# Altium PCB PCB3.PcbDoc
Units mil, origin at the board's own origin, x right, y up, seen from the top; angles counter-clockwise.
Board outline 6000 x 4000 mil, 2 copper layers (Top Layer, Bottom Layer); 61 components, 65 nets, 269 pads, 0 vias.
Unrouted connection lines stored in the file: 151.
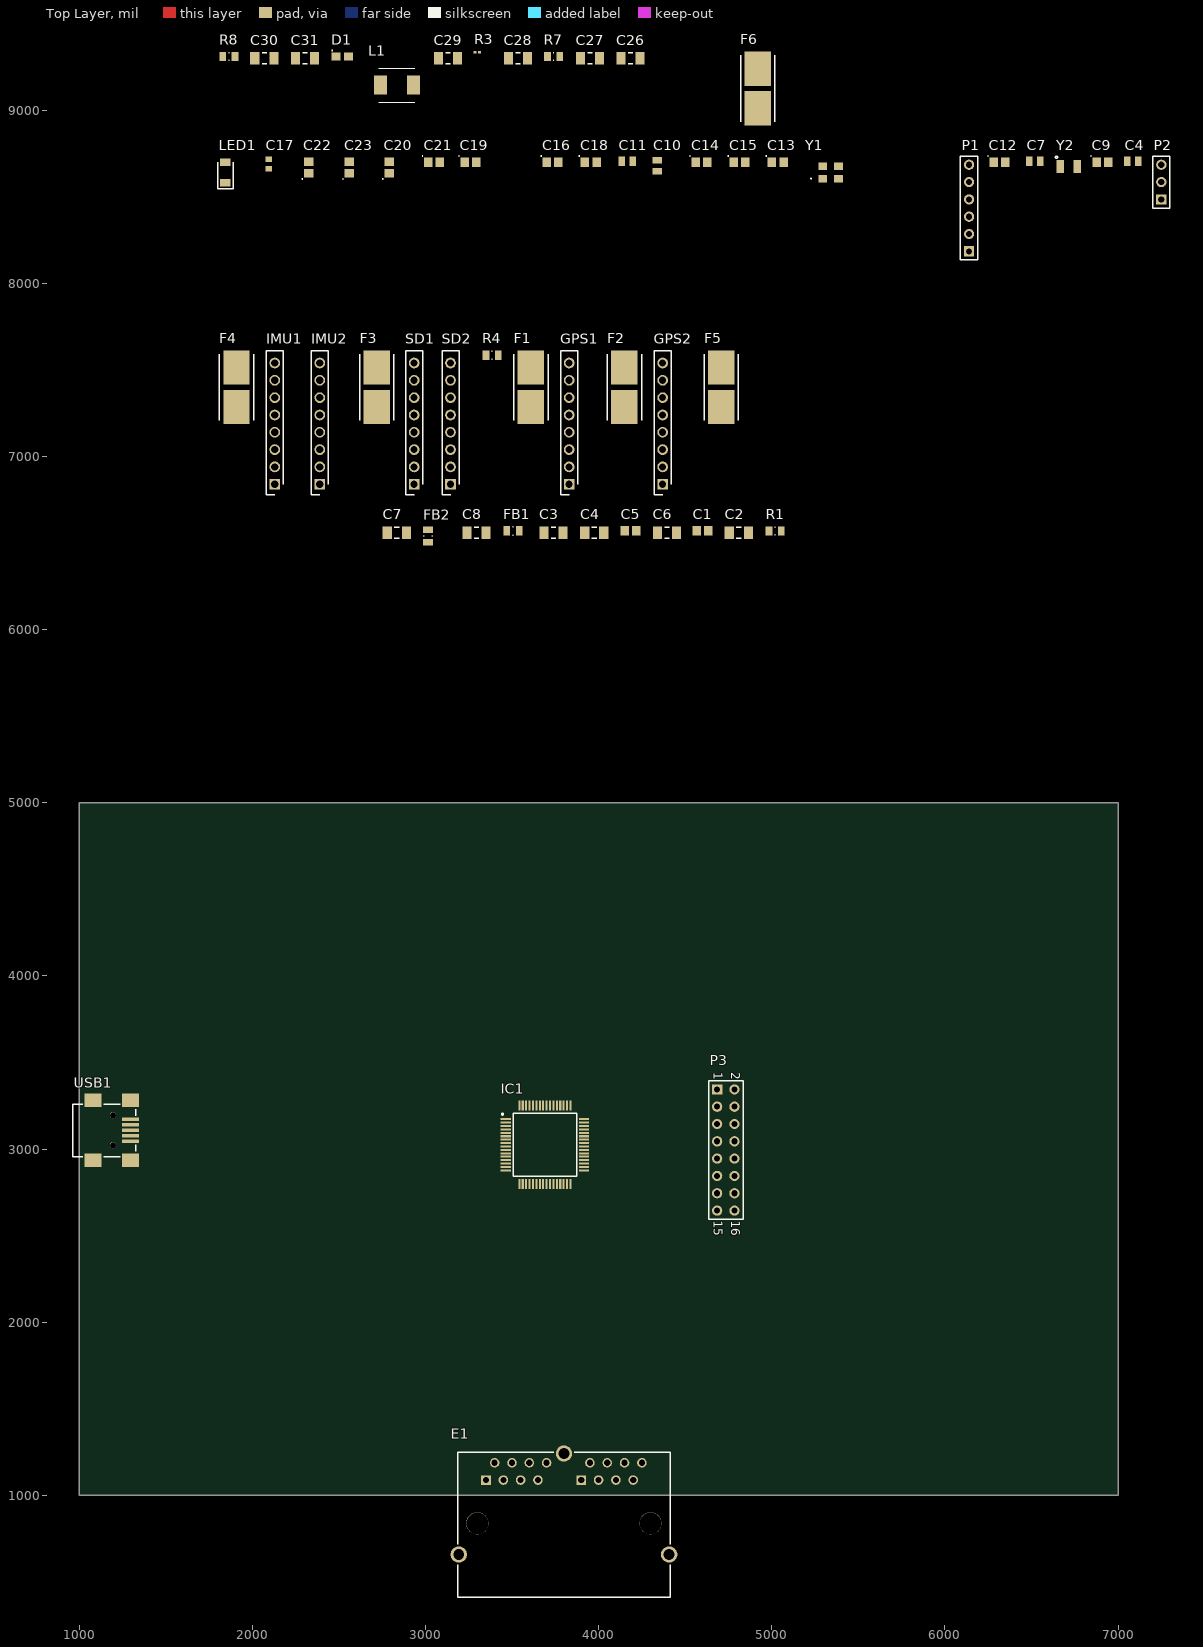
[diagram p0: Top Layer view]
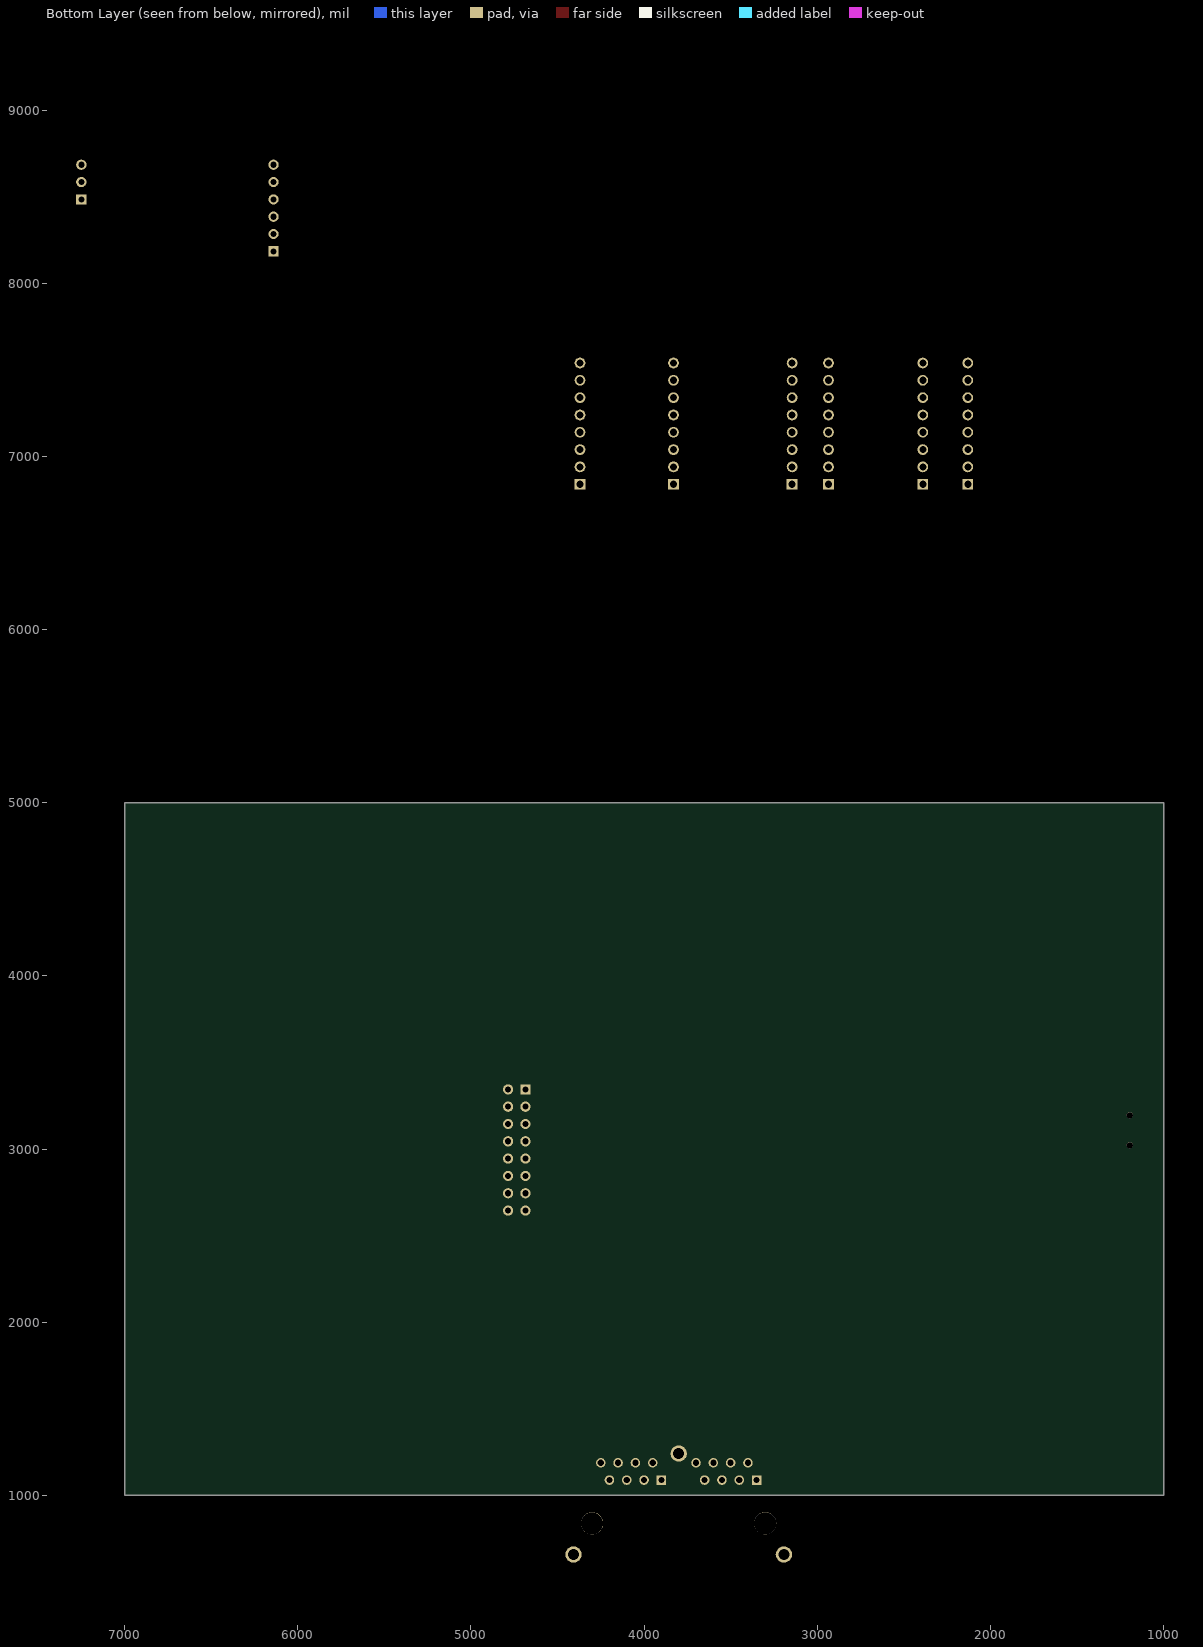
[diagram p1: Bottom Layer view, seen from below]

## Layer stack, top to bottom
Top Solder: solder mask 0.4, Solder Resist, Dk 3.5
Top Layer: signal copper 1.4
Dielectric 1: dielectric 12.6, FR-4, Dk 4.8
Bottom Layer: signal copper 1.4
Bottom Solder: solder mask 0.4, Solder Resist, Dk 3.5

## Board outline
1000,1000 7000,1000 7000,5000 1000,5000

## Design rules (kind name [scope] priority, off if disabled: settings)
Clearance [All] p1: gap=10 ignorepadtopadclearanceinfootprint=FALSE except(0: Arc-Hole Track-Hole SMDPad-Hole THPad-Hole Via-Hole Fill-Hole Poly-Hole Region-Hole Text-Hole)
DiffPairsRouting [All] p1: maxlimit=10 minlimit=10 mostfreqgap=10 toplayer_minwidth=15 toplayer_maxwidth=15 toplayer_prefwidth=15 bottomlayer_minwidth=15 bottomlayer_maxwidth=15 bottomlayer_prefwidth=15 maxuncoupledlength=500
PolygonConnect [All] p1: connectstyle=Relief reliefconductorwidth=10 reliefentries=4 polygonreliefangle="90 Angle" airgapwidth=10
RoomDefinition Supply [InComponentClass('Supply')] p1: confinementstyle=ConfineIn formatcopy=TRUE lockcomponents=FALSE outline 1790,8895 5035,8895 5035,9455 1790,9455
RoomDefinition MCU [InComponentClass('MCU')] p2: confinementstyle=ConfineIn formatcopy=TRUE lockcomponents=FALSE outline 1790,6505 7325,6505 7325,8845 1790,8845
RoomDefinition Componentes [InComponentClass('Componentes')] p3: confinementstyle=ConfineIn formatcopy=TRUE lockcomponents=FALSE outline 1790,6760 4825,6760 4825,7730 1790,7730
RoomDefinition CAN [InComponentClass('CAN')] p4: confinementstyle=ConfineIn formatcopy=TRUE lockcomponents=FALSE outline 1790,5495 7180,5495 7180,8845 1790,8845
RoutingVias [All] p1: holewidth=28 width=50 viastyle="Through Hole" minholewidth=28 minwidth=50 maxholewidth=28 maxwidth=50
SolderMaskExpansion [All] p1: expansion=4
Width [All] p1: maxlimit=10 minlimit=10 preferedwidth=10
29 further rules are at their usual default settings.

## Classes and differential pairs
component class Supply: C26 C27 C28 C29 C30 C31 D1 F6 IC2 IC4 L1 R3 R7 R8 USB1
component class MCU: C4 C7 C9 C10 C11 C12 C13 C14 C15 C16 C17 C18 C19 C20 C21 C22 C23 IC1 LED1 P1 P2 P3 R1 R2 RST1 Y1 Y2
component class Componentes: Bluetooth1 F1 F2 F3 F4 F5 GPS1 GPS2 IMU1 IMU2 LED2 R4 SD1 SD2 SUSP1 SUSP2
component class CAN: C1 C2 C3 C4 C5 C6 C7 C8 E1 FB1 FB2 IC1 R1 S1
differential pair CAN: +CAN_P -CAN_N

## Components (designator, comment, footprint, x,y, rotation, side; value= is the part's Value field where it differs from the comment)
C1 "10nF,+3.3V" "C 0805" 4600,6570 r0 top
C2 "100nF,+3.3V" "C 1206" 4810,6560 r0 top
C3 "100nF,+5V" "C 1206" 3740,6560 r0 top
C4 "10uF, +5V" "C 1206" 3975,6560 r0 top
C4 "885012207126" CAPC2012X135N 7085,8705 r0 top
C5 "10nF,+5V" "C 0805" 4185,6570 r0 top
C6 "100nF,+5V" "C 1206" 4395,6560 r0 top
C7 "100nF,+5V" "C 1206" 2835,6560 r0 top
C7 "885012207126" CAPC2012X135N 6520,8705 r0 top
C8 "10uF, +5V" "C 1206" 3295,6560 r0 top
C9 "10nF" "C 0805P" 6910,8700 r0 top
C10 "885012207126" CAPC2012X135N 4340,8680 r90 top
C11 "885012207126" CAPC2012X135N 4165,8705 r0 top
C12 "1uF" "C 0805P" 6315,8700 r0 top
C13 "1uF" "C 0805P" 5035,8700 r0 top
C14 "1uF" "C 0805P" 4595,8700 r0 top
C15 "10nF" "C 0805P" 4815,8700 r0 top
C16 "1uF" "C 0805P" 3735,8700 r0 top
C17 "06035C104JAT2A" CAPC1608X90N 2095,8690 r90 top
C18 "10nF" "C 0805P" 3955,8700 r0 top
C19 "4.7uF" "C 0805P" 3260,8700 r0 top
C20 "1uF" "C 0805P" 2790,8670 r90 top
C21 "10nF" "C 0805P" 3050,8700 r0 top
C22 "1uF" "C 0805P" 2325,8670 r90 top
C23 "10nF" "C 0805P" 2560,8670 r90 top
C26 "10uF" "C 1206" 4185,9300 r0 top
C27 "100nF, 25V" "C 1206" 3950,9300 r0 top
C28 "0.1uF, 25V" "C 1206" 3535,9300 r0 top
C29 "4.7pF, 25V" "C 1206" 3130,9300 r0 top
C30 "10uF,25V" "C 1206" 2070,9300 r0 top
C31 "2.2pF, 25V" "C 1206" 2305,9300 r0 top
D1 "Valor" "LED 0805" 2520,9310 r0 top
E1 "615016137621" Ethernet2 3800,830 r0 top
F1 "015401.5DR" "Fuse Holder" 3610,7400 r90 top
F2 "015401.5DR" "Fuse Holder" 4150,7400 r90 top
F3 "015401.5DR" "Fuse Holder" 2720,7400 r90 top
F4 "015401.5DR" "Fuse Holder" 1910,7400 r90 top
F5 "015401.5DR" "Fuse Holder" 4710,7400 r90 top
F6 "015401.5DRT" "Fuse Holder" 4920,9125 r90 top
FB1 "1800Ohm, 1A" "F 0805" 3505,6570 r0 top
FB2 "1800Ohm, 1A" "F 0805" 3015,6540 r90 top
GPS1 "5-535541-6" RHDR8W60P0X254_1X8_2082X250X850P 3830,6840 r90 top
GPS2 "5-535541-6" RHDR8W60P0X254_1X8_2082X250X850P 4370,6840 r90 top
IC1 "STM32F446RET7" QFP50P1200X1200X160-64N 3690,3025 r0 top
IMU1 "5-535541-6" RHDR8W60P0X254_1X8_2082X250X850P 2130,6840 r90 top
IMU2 "5-535541-6" RHDR8W60P0X254_1X8_2082X250X850P 2390,6840 r90 top
L1 "4.7uH" MPX1D0530L150 2835,9145 r0 top
LED1 "150120GS75000" LEDC3214X78N 1845,8640 r90 top
P1 "Header 6" HDR1X6 6140,8185 r90 top
P2 "Header 3" HDR1X3 7250,8485 r90 top
P3 "Header 8X2" HDR2X8 4685,3345 r270 top
R1 "120R,+5V" "R 0805" 5020,6570 r0 top
R3 "1k" "R 0201" 3300,9335 r0 top
R4 "LED3.3V" "R 0805" 3385,7585 r0 top
R7 "33k" "R 0805" 3740,9310 r0 top
R8 "20k" "R 0805" 1865,9310 r0 top
SD1 "5-535541-6" RHDR8W60P0X254_1X8_2082X250X850P 2935,6840 r90 top
SD2 "5-535541-6" RHDR8W60P0X254_1X8_2082X250X850P 3145,6840 r90 top
USB1 "WE-Communication Connectors 651005136421" 65100516121 1195,3195 r270 top
Y1 "ECS-80-12-33-JGN-TR" ECS801233JGNTR 5340,8640 r0 top
Y2 "ECS-.327-12.5-34B" ECX-31B 6715,8675 r0 top

## Footprints (in the part's own frame and the unit in brackets; to place one, negate y for a bottom-side part, rotate by r counter-clockwise, add the part's x,y. Pads: shape width x height; smd on the part's side, far side on the other; paste and mask are expansions set on the pad)
65100516121 [mm]
  rect 0.5x2.5 smd: 1(0.6,2.6) 2(1.4,2.6) 3(2.2,2.6) 4(3,2.6) 5(3.8,2.6)
  rect 2x2.5 smd: ""(-2.2,2.6) ""(-2.2,-2.9) ""(6.6,-2.9) ""(6.6,2.6)
  round 0.9 hole 0.9 unplated: ""(0,0) ""(4.4,0)
  silkscreen extent -1.65,-5.9 6.05,3.35, body extent -2.6,-5.9 7,3.35, height 3.92
"C 0805" [mm] "Chip Capacitor, 2-Leads, Body 2,00x1,25mm, IPC Medium Density"
  rect 1.25x1.4 smd: 1(-0.85,0) 2(0.85,0)
  body extent -1.08,-0.67 1.07,0.67, height 0.9
"C 0805P" [mm] "Chip Capacitor, 2-Leads, Body 2,00x1,25mm, IPC Medium Density"
  rect 1.25x1.4 smd: 1(-0.85,0) 2(0.85,0)
  silkscreen extent -1.74,0.86 -1.64,0.96, body extent -1.08,-0.67 1.07,0.67, height 0.9
"C 1206" [mm] "Chip Capacitor, 2-Leads, Body 3,20x1,60mm, IPC Medium Density"
  rect 1.35x1.8 smd: 1(-1.4,0) 2(1.4,0)
  silkscreen extent -0.35,-0.8 0.35,0.8, body extent -1.68,-0.87 1.68,0.87, height 0.9
CAPC1608X90N [mm]
  rect 0.78x0.99 smd: 1(-0.7,0) 2(0.7,0)
  body extent -0.8,-0.41 0.8,0.41, height 0.9
CAPC2012X135N [mm]
  rect 0.96x1.39 smd: 1(-0.81,0) 2(0.81,0)
  body extent -1,-0.63 1,0.63, height 1.35
ECS801233JGNTR [mm]
  rect 1.3x1.1 smd: 1(-1.15,-0.9) 2(1.15,-0.9) 3(1.15,0.9) 4(-1.15,0.9)
  silkscreen extent -2.9,-0.95 -2.8,-0.85, body extent -1.69,-1.34 1.69,1.34, height 0.9
ECX-31B [mm]
  rect 1.1x1.9 smd: 1(-1.25,0) 2(1.25,0)
  silkscreen extent -1.94,1.19 -1.63,1.51, body extent -1.6,-0.75 1.6,0.75, height 0.9
Ethernet2 [mm]
  rect 1.4x1.4 hole 0.9: A1(-11.43,6.565) B1(2.54,6.565)
  round 1.4 hole 0.9: A2(-10.16,9.105) A3(-8.89,6.565) A4(-7.62,9.105) A5(-6.35,6.565) A6(-5.08,9.105) A7(-3.81,6.565) A8(-2.54,9.105) B2(3.81,9.105) B3(5.08,6.565) B4(6.35,9.105) B5(7.62,6.565) B6(8.89,9.105) B7(10.16,6.565) B8(11.43,9.105)
  round 3.25 hole 3.25 unplated: MH1(-12.7,0.215) MH2(12.7,0.215)
  round 2.4 hole 1.6: S1(-15.435,-4.355) S2(15.435,-4.355) S3(0,10.455)
  silkscreen extent -15.56,-10.64 15.56,10.63, body extent -15.57,-10.64 15.56,10.63, height 13.75
"F 0805" [mm] "Chip Resistor, 2-Leads, Body 2,00x1,25mm, IPC Medium Density"
  rect 0.95x1.4 smd: 1(-0.925,0) 2(0.925,0)
  silkscreen extent -0.05,-0.6 0.05,0.6, body extent -1.05,-0.7 1.05,0.7, height 0.55
"Fuse Holder" [mm]
  rect 5.05x3.85 smd: 1(-2.9,0.025) 2(2.9,0.025)
  silkscreen extent -4.86,-2.49 4.87,2.54, body extent -4.86,-2.51 4.87,2.52, height 3.82
HDR1X3 [mm] "Connector; Header; 3 Position"
  rect 1.5x1.5 hole 0.9: 1(0,0)
  round 1.5 hole 0.9: 2(2.54,0) 3(5.08,0)
  silkscreen extent -1.27,-1.27 6.35,1.27
HDR1X6 [mm] "Connector; Header; 6 Position"
  rect 1.5x1.5 hole 0.9: 1(0,0)
  round 1.5 hole 0.9: 2(2.54,0) 3(5.08,0) 4(7.62,0) 5(10.16,0) 6(12.7,0)
  silkscreen extent -1.27,-1.27 13.97,1.27
HDR2X8 [mm] "Connector; Header; 8x2 Position"
  rect 1.5x1.5 hole 0.9: 1(0,0)
  round 1.5 hole 0.9: 2(0,2.54) 3(2.54,0) 4(2.54,2.54) 5(5.08,0) 6(5.08,2.54) 7(7.62,0) 8(7.62,2.54) 9(10.16,0) 10(10.16,2.54) 11(12.7,0) 12(12.7,2.54) 13(15.24,0) 14(15.24,2.54) 15(17.78,0) 16(17.78,2.54)
  silkscreen extent -1.27,-1.27 19.05,3.81
"LED 0805" [mm] "Molded Diode, 2-Leads, Body 2,00x1,25mm, IPC Medium Density"
  rect 1.3x1.15 smd: 1(-0.925,0) 2(0.925,0)
  silkscreen extent -1.52,0.83 -1.42,0.92, body extent -1.05,-0.67 1.05,0.67, height 1.1
LEDC3214X78N [mm]
  rect 1.1x1.55 smd: 1(-1.5,0) 2(1.5,0)
  silkscreen extent -2.4,-1.12 1.5,1.12, body extent -1.6,-0.8 1.6,0.8, height 0.68
MPX1D0530L150 [mm]
  rect 1.905x2.79 smd: 1(-2.425,0) 2(2.425,0)
  silkscreen extent -2.65,-2.5 2.65,2.5, body extent -3.19,-2.5 3.19,2.5, height 3.1
QFP50P1200X1200X160-64N [mm]
  rect 1.475x0.3 smd: 1(-5.738,3.75) 2(-5.738,3.25) 3(-5.738,2.75) 4(-5.738,2.25) 5(-5.738,1.75) 6(-5.738,1.25) 7(-5.738,0.75) 8(-5.738,0.25) 9(-5.738,-0.25) 10(-5.738,-0.75) 11(-5.738,-1.25) 12(-5.738,-1.75) 13(-5.738,-2.25) 14(-5.738,-2.75) 15(-5.738,-3.25) 16(-5.738,-3.75) 33(5.738,-3.75) 34(5.738,-3.25) 35(5.738,-2.75) 36(5.738,-2.25) 37(5.738,-1.75) 38(5.738,-1.25) 39(5.738,-0.75) 40(5.738,-0.25) 41(5.738,0.25) 42(5.738,0.75) 43(5.738,1.25) 44(5.738,1.75) 45(5.738,2.25) 46(5.738,2.75) 47(5.738,3.25) 48(5.738,3.75)
  rect 0.3x1.475 smd: 17(-3.75,-5.738) 18(-3.25,-5.738) 19(-2.75,-5.738) 20(-2.25,-5.738) 21(-1.75,-5.738) 22(-1.25,-5.738) 23(-0.75,-5.738) 24(-0.25,-5.738) 25(0.25,-5.738) 26(0.75,-5.738) 27(1.25,-5.738) 28(1.75,-5.738) 29(2.25,-5.738) 30(2.75,-5.738) 31(3.25,-5.738) 32(3.75,-5.738) 49(3.75,5.738) 50(3.25,5.738) 51(2.75,5.738) 52(2.25,5.738) 53(1.75,5.738) 54(1.25,5.738) 55(0.75,5.738) 56(0.25,5.738) 57(-0.25,5.738) 58(-0.75,5.738) 59(-1.25,5.738) 60(-1.75,5.738) 61(-2.25,5.738) 62(-2.75,5.738) 63(-3.25,5.738) 64(-3.75,5.738)
  silkscreen extent -6.35,-4.65 4.65,4.65, body extent -6,-6 6,6, height 1.6
"R 0201" [mm] "Chip Resistor, 2-Leads, Body 0,60x0,30mm, IPC Medium Density"
  rect 0.45x0.35 smd: 1(-0.325,0) 2(0.325,0)
  body extent -0.32,-0.16 0.32,0.17, height 0.26
"R 0805" [mm] "Chip Resistor, 2-Leads, Body 2,00x1,25mm, IPC Medium Density"
  rect 1x1.35 smd: 1(-0.9,0) 2(0.9,0)
  silkscreen extent -0.05,-0.58 0.05,0.58, body extent -1.05,-0.67 1.05,0.67, height 0.6
RHDR8W60P0X254_1X8_2082X250X850P [mm]
  rect 1.575x1.575 hole 1.05: 1(0,0)
  round 1.575 hole 1.05: 2(2.54,0) 3(5.08,0) 4(7.62,0) 5(10.16,0) 6(12.7,0) 7(15.24,0) 8(17.78,0)
  silkscreen extent -1.52,-1.25 19.55,1.25, body extent -1.52,-1.25 19.3,1.25, height 8.5

## Part data
C1 C5: library part 885012207126_6, "WCAP-CSGP Multilayer Ceramic Chip Capacitor, General Purpose, size 0805, X7R, 47nF, 100V", Capacitance=47nF, Capacitance Tolerance=+/-10%, Isolation Resistance=>=2.1GOhm, Manufacturer="Wurth Elektronik", Manufacturer Part Number=885012207126, Operating Temperature="-55 to +125degC", Rated Voltage=100VDC, Ceramic Type=X7R, ComponentLink1Description=Manufacturer, ComponentLink1URL=http://www.we-online.de, ComponentLink2Description=Datasheet, ComponentLink2URL=https://www.we-online.com/catalog/datasheet/885012207126.pdf, Dissipation Factor=#NAME?, Height=1.25mm, Mounting Technology=SMT, Packaging="Tape and Reel", Published Date="May 2020", Size=0805, Technical Reference=X7R0805473K100DFCT10000
C2: library part 885012208015_1, "WCAP-CSGP General Purpose Ceramic Capacitors, size 1206, 2.2uF, +/-10%, 10VDC", Capacitance=2.2uF, Capacitance Tolerance=+/-10%, Isolation Resistance=>=0.2GOhm, Operating Temperature="-55 to +125degC", Part Number=885012208015, Rated Voltage=10VDC, Ceramic Type=X7R, ComponentLink1Description=Manufacturer, ComponentLink1URL=http://www.we-online.de, ComponentLink2Description=Datasheet, ComponentLink2URL=https://katalog.we-online.com/pbs/datasheet/885012208015.pdf, Dissipation Factor=#NAME?, Height="1.15mm +/-0.15mm", Mounting Technology=SMT, Packaging="Tape and Reel", Published Date="August 2019", Publisher="Wurth Elektronik", Size=1206, Technical Reference=X7R1206225K010DFCT10000
C3 C6 C7: library part 885012208013_4, "WCAP-CSGP General Purpose Ceramic Capacitors, size 1206, 1uF, +/-10%, 10VDC", Capacitance=1uF, Capacitance Tolerance=+/-10%, Isolation Resistance=>=0.5GOhm, Operating Temperature="-55 to +125degC", Part Number=885012208013, Rated Voltage=10VDC, Ceramic Type=X7R, ComponentLink1Description=Manufacturer, ComponentLink1URL=http://www.we-online.de, ComponentLink2Description=Datasheet, ComponentLink2URL=https://katalog.we-online.com/pbs/datasheet/885012208013.pdf, Dissipation Factor=#NAME?, Height="1.15mm +/-0.15mm", Mounting Technology=SMT, Packaging="Tape and Reel", Published Date="August 2019", Publisher="Wurth Elektronik", Size=1206, Technical Reference=X7R1206105K010DFCT10000
C4 C8: library part 885012208013_5, "WCAP-CSGP General Purpose Ceramic Capacitors, size 1206, 1uF, +/-10%, 10VDC", Capacitance=1uF, Capacitance Tolerance=+/-10%, Isolation Resistance=>=0.5GOhm, Operating Temperature="-55 to +125degC", Part Number=885012208013, Rated Voltage=10VDC, Ceramic Type=X7R, ComponentLink1Description=Manufacturer, ComponentLink1URL=http://www.we-online.de, ComponentLink2Description=Datasheet, ComponentLink2URL=https://katalog.we-online.com/pbs/datasheet/885012208013.pdf, Dissipation Factor=#NAME?, Height="1.15mm +/-0.15mm", Mounting Technology=SMT, Packaging="Tape and Reel", Published Date="August 2019", Publisher="Wurth Elektronik", Size=1206, Technical Reference=X7R1206105K010DFCT10000
C4 C7 C10 C11: "Capacitor", Manufacturer_Name="Wurth Elektronik", Mouser Part Number=710-885012207126, Datasheet Link=https://katalog.we-online.com/pbs/datasheet/885012207126.pdf, Height=1.35mm, Manufacturer_Part_Number=885012207126, Mouser Price/Stock=https://www.mouser.co.uk/ProductDetail/Wurth-Elektronik/885012207126?qs=MLItCLRbWsx1mdA6iQ1T9Q%3D%3D
C9 C12 C13 C14 C15 C16 C18 C19 C20 C21 C22 C23 C26 C27 C28 C29 C30 C31: library part Condensador, "Condensador"
C17: "Capacitor", Manufacturer_Name=AVX, Mouser Part Number=581-06035C104JAT2A, Arrow Part Number=06035C104JAT2A, Arrow Price/Stock=https://www.arrow.com/en/products/06035c104jat2a/avx, Datasheet Link=http://www.mouser.com/catalog/supplier/library/pdf/AVXSurfaceMountCeramic.pdf, Height=0.9mm, Manufacturer_Part_Number=06035C104JAT2A, Mouser Price/Stock=https://www.mouser.co.uk/ProductDetail/AVX/06035C104JAT2A/?qs=EbDiPP9peV%252BVb%2FIEcsjONQ%3D%3D
D1: library part LED, "LED"
E1: "WR-MJ Modular Jack THT Horizontal Shielded Dual Port 8P8C Tab Down", Contact Resistance=20mOhm, Insulation Resistance=500MOhm, Operating Temperature="-40 to +85degC", Rated Current=1.5A, Withstanding Voltage=1000VAC, Working Voltage=120VAC, ComponentLink1Description=Manufacturer, ComponentLink1URL=http://www.we-online.de, ComponentLink2Description=Datasheet, ComponentLink2URL=https://katalog.we-online.com/em/datasheet/615016137621.pdf, Mounting Technology=THT, Packaging=Tray, Part Number=615016137621, Published Date="November 2019", Publisher="Wurth Elektronik", Type=Horizontal, xPxC=8P8C
F1 F2 F3 F4 F5: "Fuse", Manufacturer_Name=LITTELFUSE, Mouser Part Number=576-015401.5DR, RS Part Number=7382879P, Allied_Number=70519132, Allied Price/Stock=https://www.alliedelec.com/littelfuse-015401-5dr/70519132/, Datasheet Link=https://www.littelfuse.com/~/media/electronics/datasheets/fuses/littelfuse_fuse_154_154t_154l_154tl_datasheet.pdf.pdf, Height=3.81mm, Manufacturer_Part_Number=015401.5DR, Mouser Price/Stock=https://www.mouser.com/Search/Refine.aspx?Keyword=576-015401.5DR, RS Price/Stock=http://uk.rs-online.com/web/p/products/7382879P
F6: "Fuse", Manufacturer_Name=LITTELFUSE, Mouser Part Number=576-015401.5DRT, Arrow Part Number=015401.5DRT, Arrow Price/Stock=https://www.arrow.com/en/products/015401.5drt/littelfuse?region=nac, Datasheet Link=https://componentsearchengine.com/Datasheets/2/015401.5DRT.pdf, Height=3.81mm, Manufacturer_Part_Number=015401.5DRT, Mouser Price/Stock=https://www.mouser.co.uk/ProductDetail/Littelfuse/015401.5DRT?qs=gu7KAQ731USSn8iq6YrVPw%3D%3D
FB1 FB2: library part 742792090, "WE-CBF SMT EMI Suppression Ferrite Bead, size 0805, 1800Ohm, 1A", DC Resistance max.=0.4Ohm, Manufacturer="Wurth Elektronik", Operating Temperature="-55 to +125degC", Rated Current=1A, ComponentLink1Description=Manufacturer, ComponentLink1URL=http://www.we-online.de, ComponentLink2Description=Datasheet, ComponentLink2URL=https://www.we-online.com/catalog/datasheet/742792090.pdf, Impedance @100MHz=1800Ohm, Impedance max.=2000Ohm, Manufacturer Part Number=742792090, Mounting Technology=SMT, Packaging="Tape and Reel", Published Date="March 2020", Size=0805, Type="Wide Band"
GPS1 GPS2 IMU1 IMU2 SD1 SD2: "Connector Socket Strip RCP 8 POS 2.54mm Solder ST Thru-Hole Gang of Tubes", Package=None, Availability=Unavailable, MF="TE Connectivity", MP=5-535541-6, Price=None, SnapEDA_Link=https://www.snapeda.com/parts/5-535541-6/TE%20Connectivity%20AMP%20Connectors/view-part/497141/?ref=snap
IC1: "Integrated Circuit", Manufacturer_Name=STMicroelectronics, Mouser Part Number=511-STM32F446RET7, Arrow Part Number=STM32F446RET7, Arrow Price/Stock=https://www.arrow.com/en/products/stm32f446ret7/stmicroelectronics?region=nac, Datasheet Link=https://componentsearchengine.com/Datasheets/5/STM32F446RET7.pdf, Height=1.6mm, Manufacturer_Part_Number=STM32F446RET7, Mouser Price/Stock=https://www.mouser.co.uk/ProductDetail/STMicroelectronics/STM32F446RET7?qs=qzCNEk%252BRr%252BZ3vIhuSM4Ejg%3D%3D
L1: library part Inductor, "Inductor"
LED1: "LED", Manufacturer_Name="Wurth Elektronik", Mouser Part Number=710-150120GS75000, Height=0.78mm, Manufacturer_Part_Number=150120GS75000, Mouser Price/Stock=https://www.mouser.co.uk/ProductDetail/Wurth-Elektronik/150120GS75000?qs=LlUlMxKIyB3I3AMxrmBw4A%3D%3D
P1: "Header, 6-Pin", LatestRevisionDate=17-Jul-2002, LatestRevisionNote="Re-released for DXP Platform.", Publisher="Altium Limited"
P2: "Header, 3-Pin", LatestRevisionDate=17-Jul-2002, LatestRevisionNote="Re-released for DXP Platform.", Publisher="Altium Limited"
P3: "Header, 8-Pin, Dual row", LatestRevisionDate=17-Jul-2002, LatestRevisionNote="Re-released for DXP Platform.", Publisher="Altium Limited"
R1: library part 560050320011_9, "WRIS-KSKE SMT Thick Film Resistor, size 0805, 1Ohm, 0.33W", Manufacturer="Wurth Elektronik", Manufacturer Part Number=560050320011, Operating Temperature="-55 to +155degC", Rated Current=0.57A, Rated Power=0.33W, Resistance=1Ohm, Resistance Tolerance=+/-1%, Temperature Coefficient of Resistance=+/-100ppm/degC, ComponentLink1Description=Manufacturer, ComponentLink1URL=http://www.we-online.de, ComponentLink2Description=Datasheet, ComponentLink2URL=https://www.we-online.com/catalog/datasheet/560050320011.pdf, Height=0.6mm, Length=2mm, Mounting Technology=SMT, Packaging="Tape and Reel", Published Date="May 2020", Size=0805, Technical Reference=KE08051R00F103KAATP0000, Width=1.25mm
R3 R7 R8: library part Resistencia, "Resistencia"
R4: library part 560050320011_2, "WRIS-KSKE SMT Thick Film Resistor, size 0805, 1Ohm, 0.33W", Manufacturer="Wurth Elektronik", Manufacturer Part Number=560050320011, Operating Temperature="-55 to +155degC", Rated Current=0.57A, Rated Power=0.33W, Resistance=1Ohm, Resistance Tolerance=+/-1%, Temperature Coefficient of Resistance=+/-100ppm/degC, ComponentLink1Description=Manufacturer, ComponentLink1URL=http://www.we-online.de, ComponentLink2Description=Datasheet, ComponentLink2URL=https://www.we-online.com/catalog/datasheet/560050320011.pdf, Height=0.6mm, Length=2mm, Mounting Technology=SMT, Packaging="Tape and Reel", Published Date="May 2020", Size=0805, Technical Reference=KE08051R00F103KAATP0000, Width=1.25mm
USB1: "WR-COM Mini USB Vertical TH Type B 5 Contacts", Manufacturer="Würth Elektronik eiSos GmbH", partNo=651005136421, ComponentLink1 Description=Manufacturer, ComponentLink1URL=http://www.we-online.de, ComponentLink2 Description=Datasheet, ComponentLink2URL=http://katalog.we-online.de/em/datasheet/651005136421.pdf, Created by="Karrer Zheng", Created Date=10/10/2014, NoPins=5
Y1: "Crystal or Oscillator", Manufacturer_Name=ECS, Mouser Part Number=520-80-12-33-JGN-TR, Arrow Part Number=ECS-80-12-33-JGN-TR, Arrow Price/Stock=https://www.arrow.com/en/products/ecs-80-12-33-jgn-tr/ecs-international?region=nac, Datasheet Link=https://ecsxtal.com/store/pdf/ecx-32.pdf, Height=0.8mm, Manufacturer_Part_Number=ECS-80-12-33-JGN-TR, Mouser Price/Stock=https://www.mouser.co.uk/ProductDetail/ECS/ECS-80-12-33-JGN-TR?qs=d0WKAl%252BL4KaVcQK0q%252BTt4Q%3D%3D
Y2: "Crystal or Oscillator", Manufacturer_Name=ECS, Mouser Part Number=520-ECS-327-12.5-34B, Datasheet Link=https://componentsearchengine.com/Datasheets/1/ECS-.327-12.5-34B.pdf, Manufacturer_Part_Number=ECS-.327-12.5-34B, Mouser Price/Stock=https://www.mouser.co.uk/ProductDetail/ECS/ECS-.327-12.5-34B?qs=muFWWzTLGEJ4ncukpyY8Bw%3D%3D

## Nets (pads, with @x,y where several pads share a name; then routed paths per layer and width w, separated by ;. In a path a pad name is that pad's centre, name@x,y a point inside that pad or via, vN(x,y) a via of type N, cw(c..) or ccw(c..) an arc to the next point about the centre after c; other vN are vias at no path point)
+24V: E1.A1 E1.A3 E1.B1 E1.B3 F6.2
B3_RX: IC1.53
B3_TX: IC1.54
"BOOT SEL": P2.2
"CAN Rx": IC1.33
"CAN Tx": IC1.34
CAN_N: E1.A8 E1.B2
CAN_P: E1.A6 E1.B4 IC1.17
CANGND: C5.1 C6.1 C7.1@2779.88,6560 E1.A2 E1.B8 E1.S1 E1.S2 E1.S3 FB2.1 IC1.11 IC1.16
CS_IMU: IC1.26 IMU1.3
CS_SD: IC1.25 SD1.3
Enable: IC1.52
GND: C1.1 C2.1 C3.1 C4.1 C7.1@6488.11,8705 C9.2 C10.1 C11.1 C12.2 C13.2 C14.2 C15.2 C16.1 C17.1 C18.1 C19.2 C20.2 C21.2 C22.2 C23.2 C26.1 C27.1 C29.1 C30.2 C31.1 D1.1 E1.A5 E1.A7 E1.B5 E1.B7 GPS1.8 GPS2.8 IC1.10 IC1.18 IC1.31 IC1.47 IC1.63 IMU1.8 IMU2.1 IMU2.8 LED1.1 P1.3 P2.1 P3.2 P3.16 R4.1 SD1.8 SD2.8 USB1.5
"GPS Rx": IC1.14
"GPS Tx": IC1.15
GPS_RX: GPS2.4
GPS_TX: GPS2.3
"HSE IN": IC1.5 Y1.1
"HSE OUT": Y1.3
"LSE IN": C4.2@7116.89,8705 IC1.3 Y2.2
"LSE OUT": C7.2@6551.89,8705 IC1.4 Y2.1
MISO: IC1.22 IMU1.5 P3.13 SD1.5
MOSI: IC1.23 IMU1.6 P3.14 SD1.6
NetBluetooth1_6: F5.2
NetC8_1: C8.1 FB2.2
NetC10_2: C10.2 Y1.4
NetC11_2: C11.2 Y1.2
NetC19_1: C19.1 IC1.30
NetC28_1: C28.1 C29.2 L1.2
NetC28_2: C28.2
NetC31_2: C31.2
NetD1_2: D1.2 R3.2
NetF1_2: F1.2 GPS1.7
NetF2_2: F2.2 GPS2.7
NetF3_2: F3.2 SD1.7
NetF4_2: F4.2 IMU1.7
NetF6_1: F6.1 R7.1
NetIC1_60: IC1.60 R1.1
NetIC4_6: R8.2
NetIC4_10: R7.2
NetLED1_2: LED1.2
NetLED2_1: R4.2
NetR1_2: R1.2
NRST: C17.2 IC1.7 P1.5
PA4: IC1.20 P3.8
PA8: IC1.41 P3.5
PA9: IC1.42 P3.4
PA10: IC1.43 P3.3
PB6: IC1.58 P3.7
PC6: IC1.37 P3.11
PC7: IC1.38 P3.10
PC8: IC1.39 P3.9
PC9: IC1.40 P3.6
SCLK: IC1.21 IMU1.4 P3.12 SD1.4
State: 
SUSP1: IC1.27
SUSP2: IC1.9
SWO: IC1.55 P1.6
TCK: IC1.49 P1.2
TMS: IC1.46 P1.4
"USER LED": IC1.36
VCC: C3.2 C4.2@4030.12,6560 C27.2 C30.1 F2.1 F5.1 IC1.8 L1.1 P3.1 R3.1 R8.1 USB1.1
VIO: C1.2 C2.2 C9.1 C12.1 C13.1 C14.1 C15.1 C16.2 C18.2 C20.1 C21.1 C22.1 C23.1 C26.2 F1.1 F3.1 F4.1 IC1.1 IC1.6 IC1.13 IC1.32 IC1.48 IC1.64 P1.1 P2.3 P3.15
VISOIN: C5.2 C6.2 C8.2 FB1.2 IC1.19
VISOOUT: C7.2@2890.12,6560 FB1.1 IC1.12
pads on no net: E1.A4 E1.B6 E1.MH1 E1.MH2 GPS1.1 GPS1.2 GPS1.3 GPS1.4 GPS1.5 GPS1.6 GPS2.1 GPS2.2 GPS2.5 GPS2.6 IC1.2 IC1.24 IC1.28 IC1.29 IC1.35 IC1.44 IC1.45 IC1.50 IC1.51 IC1.56 IC1.57 IC1.59 IC1.61 IC1.62 IMU1.1 IMU1.2 IMU2.2 IMU2.3 IMU2.4 IMU2.5 IMU2.6 IMU2.7 SD1.1 SD1.2 SD2.1 SD2.2 SD2.3 SD2.4 SD2.5 SD2.6 SD2.7 USB1. USB1.2 USB1.3 USB1.4

## Text inside footprints (layer, text, board x,y; h text height)
P3: Top Overlay "2" at 4765,3445 h50 r270; Top Overlay "1" at 4665,3445 h50 r270; Top Overlay "15" at 4665,2585 h50 r270; Top Overlay "16" at 4765,2585 h50 r270